# EAGLE board Blocky_Uno (EAGLE 9.1.0)
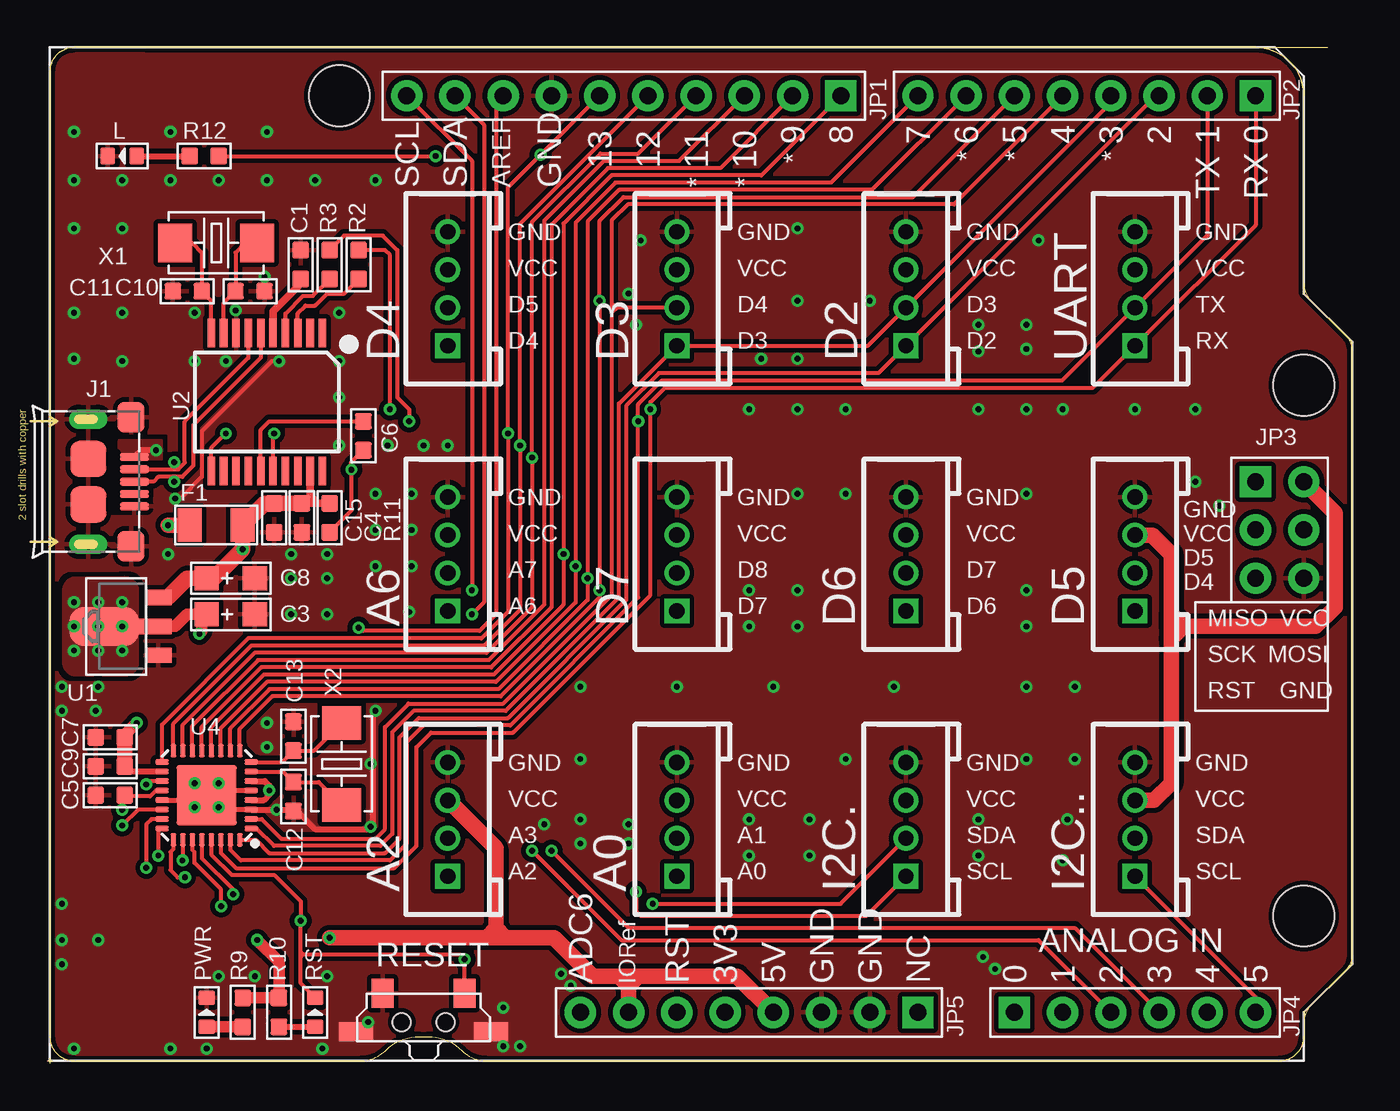
[diagram p0: board, top side]
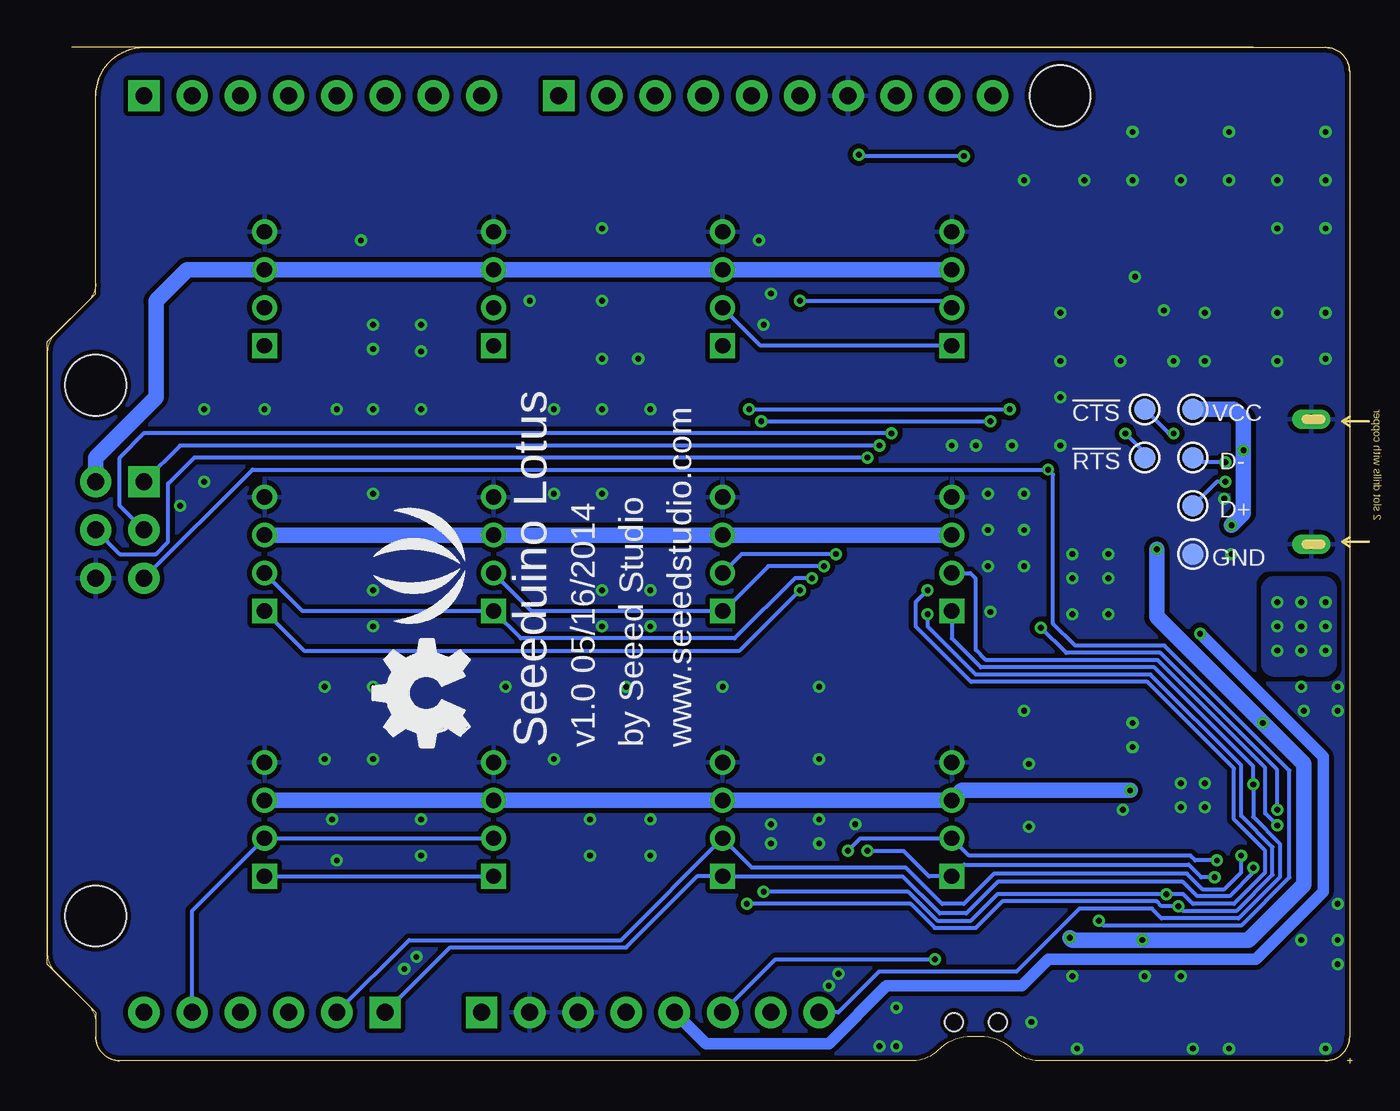
[diagram p1: board, bottom side, seen from below]

Size 68.71 x 53.47 mm. Coordinates in mm from the lower left corner, seen from the top.
Outline: 1.4,0.13 arc-90 0.13,1.4
Outline: 0.13,52.2 arc-90 1.4,53.47
Outline: 63.63,53.47 arc-90 66.17,50.93
Outline: 66.17,41.04 arc45 66.54,40.14 68.33,38.35 arc-45 68.71,37.45 68.71,5.73 arc-45 68.33,4.83 66.54,3.04 arc45 66.17,2.14
Outline: 66.17,2.14 66.17,1.4
Outline: 66.17,1.4 arc-90 64.9,0.13
Outline: 0.13,1.4 arc90 1.4,0.13
Outline: 64.9,0.13 arc90 66.17,1.4
Outline: 1.4,53.47 arc90 0.13,52.2
Outline: 0.13,1.4 arc90 1.4,0.13
Outline: 64.9,0.13 arc90 66.17,1.4
Outline: 66.17,50.93 arc90 63.63,53.47
Outline: 66.17,1.4 arc-90 64.9,0.13
Outline: 1.4,53.47 arc90 0.13,52.2
Outline: 0.13,1.4 arc90 1.4,0.13
Outline: 66.17,41.04 66.17,40.51 68.71,37.97 68.71,5.21 66.17,2.67 66.17,2.14
Outline: 66.17,50.93 arc90 63.63,53.47
Outline: 21.83,0.65 arc45 23.1,0.13
Outline: 16.53,0.13 arc45 17.8,0.65
Outline: 17.8,0.65 arc-45 19.59,1.4
Outline: 20.03,1.4 arc-45 21.83,0.65
Outline: 5.21,53.47 67.44,53.47
Outline: 0.13,1.4 arc90 1.4,0.13
Outline: 64.9,0.13 arc90 66.17,1.4
Outline: 1.4,53.47 arc90 0.13,52.2
Outline: 0.13,1.4 arc90 1.4,0.13
Outline: 64.9,0.13 arc90 66.17,1.4
Outline: 66.17,50.93 arc90 63.63,53.47
Outline: 66.17,1.4 arc-90 64.9,0.13
Outline: 63.63,53.47 1.4,53.47
Outline: 1.4,53.47 arc90 0.13,52.2
Outline: 0.13,52.2 0.13,1.4
Outline: 0.13,1.4 arc90 1.4,0.13
Outline: 66.17,41.04 66.17,50.93
Outline: 66.17,50.93 arc90 63.63,53.47
Outline: 21.83,0.65 arc45 23.1,0.13
Outline: 23.1,0.13 64.9,0.13
Outline: 1.4,0.13 16.53,0.13
Outline: 16.53,0.13 arc45 17.8,0.65
Outline: 17.8,0.65 arc-45 19.59,1.4
Outline: 19.59,1.4 20.03,1.4
Outline: 20.03,1.4 arc-45 21.83,0.65
Outline: 0,0.13 0.25,0.13
Outline: 0.13,0.25 0.13,0
Copper layers (1*16): Top 0.035mm / dielectric 1.5mm / Bottom 0.035mm
Design rules "SeeedStudio_rule_no_angle_090911 *": minimum track width 6mil, minimum drill 12mil, track to track 6mil, track to pad 6mil, pad to pad 6mil, via to via 6mil, smd to smd 0mil, copper to edge 10mil, drill to drill 10mil, minimum pad ring 10mil, minimum via ring 6mil, stop-mask expansion 2mil, vias tented up to drill 100mil, thermal gap 10mil
Net classes: 0 default: width 0.152 mm, drill 0.305 mm, clearance 0.152 mm; 3 usbvcc: width 0.203 mm, drill 0.305 mm, clearance 0.203 mm

## Footprints (pad centres in the part's own frame; a part is rotated, then mirrored left to right if it is on the bottom)
TP_4545 = smd 1.143 x 1.143: T 0,0
4P-2.0 = drill 0.8 pad 1.27 square: 1 -3,0 | drill 0.8 pad 1.27: 2 -1,0; 3 1,0; 4 3,0
C0603 = smd 0.889 x 0.889: 1 -0.762,0; 2 0.762,0
AVX-A = smd 1.27 x 1.27: + -1.27,0; - 1.27,0
F1206 = smd 1.27 x 1.778: 1 -1.397,0; 2 1.397,0
MICRO-USB5+6P-SMD-0.65-B = smd 0.4 x 1.5: 1 -1.3,-0.25; 2 -0.65,-0.25; 3 0,-0.25; 4 0.65,-0.25; 5 1.3,-0.25 | smd 1.6 x 1.4: S1 -3.4,-0.427; S6 3.4,-0.427 | drill 0.508 pad 1.016 long: S2 -3.3,-2.675; S5 3.3,-2.675 | smd 1.9 x 1.9: S3 -1.2,-2.675; S4 1.2,-2.675
LED-0603 = smd 0.762 x 0.889: + -0.762,0; - 0.762,0
R0603 = smd 0.889 x 0.889: 1 -0.762,0; 2 0.762,0
4P-SMD-7X3.5X3.5H = smd 1.143 x 1.524: 1 -2.159,1.524; 2 2.159,1.524 | smd 1.778 x 1.016: S1 -3.556,-0.508; S2 3.556,-0.508 | hole 0.95: -1.15,0; 1.15,0
SOT89 = smd 0.8 x 1.4: 1 -1.524,-1.905; 3 1.524,-1.905 | smd 0.8 x 1.9: 2 0,-1.651 | smd 2.032 x 3.65: 4 0,0.94
SSOP20 = smd 0.4 x 1.5: 1 -2.925,-3.625; 2 -2.275,-3.625; 3 -1.625,-3.625; 4 -0.975,-3.625; 5 -0.325,-3.625; 6 0.325,-3.625; 7 0.975,-3.625; 8 1.625,-3.625; 9 2.275,-3.625; 10 2.925,-3.625; 11 2.925,3.625; 12 2.275,3.625; 13 1.625,3.625; 14 0.975,3.625; 15 0.325,3.625; 16 -0.325,3.625; 17 -0.975,3.625; 18 -1.625,3.625; 19 -2.275,3.625; 20 -2.925,3.625
ARDUINO-38P = drill 0.889 pad 1.651 square: 1 63.5,50.8; 9 41.656,50.8; 19 50.8,2.54; 25 45.72,2.54; 38 63.5,30.48 | drill 0.889 pad 1.651: 2 60.96,50.8; 3 58.42,50.8; 4 55.88,50.8; 5 53.34,50.8; 6 50.8,50.8; 7 48.26,50.8; 8 45.72,50.8; 10 39.116,50.8; 11 36.576,50.8; 12 34.036,50.8; 13 31.496,50.8; 14 28.956,50.8; 15 26.416,50.8; 16 23.876,50.8; 17 21.336,50.8; 18 18.796,50.8; 20 53.34,2.54; 21 55.88,2.54; 22 58.42,2.54; 23 60.96,2.54; 24 63.5,2.54; 26 43.18,2.54; 27 40.64,2.54; 28 38.1,2.54; 29 35.56,2.54; 30 33.02,2.54; 31 30.48,2.54; 32 27.94,2.54; 33 66.04,30.48; 34 66.04,27.94; 35 66.04,25.4; 36 63.5,25.4; 37 63.5,27.94 | hole 3.2: 15.24,50.8; 66.04,35.56; 66.04,7.62
MLF32X-W/HEAT = smd 0.7 x 0.3: 1 -2.35,1.75; 2 -2.35,1.25; 3 -2.35,0.75; 4 -2.35,0.25; 5 -2.35,-0.25; 6 -2.35,-0.75; 7 -2.35,-1.25; 8 -2.35,-1.75; 17 2.35,-1.75; 18 2.35,-1.25; 19 2.35,-0.75; 20 2.35,-0.25; 21 2.35,0.25; 22 2.35,0.75; 23 2.35,1.25; 24 2.35,1.75 | smd 0.3 x 0.7: 9 -1.75,-2.35; 10 -1.25,-2.35; 11 -0.75,-2.35; 12 -0.25,-2.35; 13 0.25,-2.35; 14 0.75,-2.35; 15 1.25,-2.35; 16 1.75,-2.35; 25 1.75,2.35; 26 1.25,2.35; 27 0.75,2.35; 28 0.25,2.35; 29 -0.25,2.35; 30 -0.75,2.35; 31 -1.25,2.35; 32 -1.75,2.35 | smd 3.175 x 3.175: HEAT 0,0
2P-SMD-5X3.2 = smd 1.778 x 2.032: 1 -2.159,0; 2 2.159,0

## Placement (x,y rotation side)
!CTS  [TP_4545]  10.92,34.42 0 bottom
!RTS  [TP_4545]  10.92,31.88 0 bottom
A0  DIP Grove  [4P-2.0]  33.15,12.83 90 top
A2  DIP Grove  [4P-2.0]  21.08,12.83 90 top
A6  DIP Grove  [4P-2.0]  21.08,26.8 90 top
C1  10nF  [C0603]  13.34,42.04 90 top
C3  22uF-10V  [AVX-A]  9.65,23.62 0 top
C4  100nF  [C0603]  13.4,28.7 90 top
C5  100nF  [C0603]  3.3,14.1 0 top
C6  100nF  [C0603]  16.64,33.02 270 top
C7  100nF  [C0603]  3.3,17.14 0 top
C8  22uF-10V  [AVX-A]  9.65,25.53 0 top
C9  100nF  [C0603]  3.3,15.62 0 top
C10  12pF  [C0603]  10.67,40.64 180 top
C11  12pF  [C0603]  7.37,40.64 0 top
C12  12pF  [C0603]  12.95,14.03 90 top
C13  12pF  [C0603]  12.95,17.21 270 top
C15  100nF  [C0603]  11.94,28.7 270 top
D2  DIP Grove  [4P-2.0]  45.21,40.77 90 top
D3  DIP Grove  [4P-2.0]  33.15,40.77 90 top
D4  DIP Grove  [4P-2.0]  21.08,40.77 90 top
D5  DIP Grove  [4P-2.0]  57.28,26.8 90 top
D6  DIP Grove  [4P-2.0]  45.21,26.8 90 top
D7  DIP Grove  [4P-2.0]  33.15,26.8 90 top
D+  [TP_4545]  8.38,29.34 0 bottom
D-  [TP_4545]  8.38,31.88 0 bottom
F1  500mA  [F1206]  8.89,28.32 0 top
GND  [TP_4545]  8.38,26.8 0 bottom
I2C.  DIP Grove  [4P-2.0]  45.21,12.83 90 top
I2C..  DIP Grove  [4P-2.0]  57.28,12.83 90 top
J1  10118193-0001LF  [MICRO-USB5+6P-SMD-0.65-B]  4.83,30.61 270 top
L  GREEN  [LED-0603]  3.94,47.75 180 top
PWR  GREEN  [LED-0603]  8.38,2.67 90 top
R2  1k  [R0603]  16.38,42.04 270 top
R3  1k  [R0603]  14.86,42.04 270 top
R9  1k  [R0603]  10.29,2.67 270 top
R10  1k  [R0603]  12.19,2.67 270 top
R11  10k  [R0603]  14.86,28.7 270 top
R12  1k  [R0603]  8.26,47.75 180 top
RESET  TS-118E  [4P-SMD-7X3.5X3.5H]  19.81,2.16 0 top
RST  RED  [LED-0603]  14.1,2.67 90 top
U1  1117-3.3V  [SOT89]  3.94,22.99 90 top
U2  CH340T  [SSOP20]  11.56,34.8 180 top
U3  [ARDUINO-38P]  0.13,0.13 0 top
U4  ATmega328mu  [MLF32X-W/HEAT]  8.38,14.1 180 top
U$2  [OSHW_FILLX200_NOTEXT]  46.48,16.64 90 bottom
U$4  [LOGO_SILK]  48.39,26.16 90 bottom
U$12  [SEEED_MASK]  3.94,2.67 0 top
UART  DIP Grove  [4P-2.0]  57.28,40.77 90 top
VCC  [TP_4545]  8.38,34.42 0 bottom
X1  12MHz  [2P-SMD-5X3.2]  8.89,43.18 0 top
X2  16MHz  [2P-SMD-5X3.2]  15.49,15.75 270 top

## Library data of the parts
!CTS !RTS D+ D- GND VCC = Discrete; PARTNO: DNP
A0 A2 A6 = Connector 
C1 C3-C13 C15 F1 L PWR R2 R3 R9-R12 RESET RST X1 X2 = Discrete
D2-D7 I2C. I2C.. UART = Connector
J1 = Seeed-Connector -2016; MPN: 10118193-0001LF
U1 U4 = IC
U2 = template
U3 = moudle
U$2 U$4 U$12 = Logo

## Nets
3V3: C3.+ U1.2 U1.4 U3.29
ADC6: A6.1 U3.32 U4.19
ADC7: A6.2 U4.22
AREF: C5.2 U3.16 U4.20
CTS: !CTS.T U2.11
DTR: C6.1 U2.15
GND: A0.4 A2.4 A6.4 C1.2 C3.- C4.1 C5.1 C7.1 C8.- C9.1 C10.1 C11.1 C12.1 C13.1 C15.2 D2.4 D3.4 D4.4 D5.4 D6.4 D7.4 GND.T I2C..4 I2C...4 J1.5 J1.S1 J1.S2 J1.S3 J1.S4 J1.S5 J1.S6 L.- PWR.- RESET.1 RESET.S1 RESET.S2 U1.1 U2.8 U3.15 U3.26 U3.27 U3.35 U4.3 U4.5 U4.21 U4.HEAT UART.4
N$2: R10.2 RST.+
N$3: PWR.+ R9.2
N$4: C10.2 U2.9 X1.2
N$5: C11.2 U2.10 X1.1
N$11: !RTS.T U2.16
N$12 [usbvcc]: F1.1 J1.1 VCC.T
N$13: L.+ R12.2
PB0: D7.2 U3.9 U4.12
PB1: U3.10 U4.13
PB2: U3.11 U4.14
PB3/MOSI: U3.12 U3.34 U4.15
PB4/MISO: U3.13 U3.38 U4.16
PB5/SCK: R12.1 U3.14 U3.37 U4.17
PC0: A0.1 U3.19 U4.23
PC1: A0.2 U3.20 U4.24
PC2: A2.1 U3.21 U4.25
PC3: A2.2 U3.22 U4.26
PC4/SDA: I2C..2 I2C...2 U3.17 U3.23 U4.27
PC5/SCL: I2C..1 I2C...1 U3.18 U3.24 U4.28
PD0/RX: R2.1 U3.1 U4.30 UART.1
PD1/TX: R3.1 U3.2 U4.31 UART.2
PD2/INT0: D2.1 U3.3 U4.32
PD3/INT1: D2.2 D3.1 U3.4 U4.1
PD4: D3.2 D4.1 U3.5 U4.2
PD5: D4.2 D5.1 U3.6 U4.9
PD6: D5.2 D6.1 U3.7 U4.10
PD7: D6.2 D7.1 U3.8 U4.11
PWR_IN: U3.25
RESET: C6.2 R11.2 RESET.2 RST.- U3.30 U3.36 U4.29
RX: R3.2 U2.4
TX: R2.2 U2.3
USB_D+: D+.T J1.3 U2.6
USB_D-: D-.T J1.2 U2.7
V3: C1.1 U2.5
VCC: A0.3 A2.3 A6.3 C4.2 C7.2 C8.+ C9.2 C15.1 D2.3 D3.3 D4.3 D5.3 D6.3 D7.3 F1.2 I2C..3 I2C...3 R9.1 R10.1 R11.1 U1.3 U2.19 U3.28 U3.31 U3.33 U4.4 U4.6 U4.18 UART.3
XTAL1: C12.2 U4.7 X2.2
XTAL2: C13.2 U4.8 X2.1

## Tracks (layer width: path | path; a pad name or v marks a point on that pad's centre or on a via)
3V3  (via drill 0.3 pad 0.64)
  Top 0.61: v8,22.61 8.13,22.73 8.13,23.49 8.26,23.62 | v3.94,22.99 U1.4 | 8.38,23.49 8.51,23.62 | U1.2 6.73,22.99 7.37,23.62 C3.+
  Top 0.813: 8.26,23.62 C3.+ 8.38,23.49
  Bottom 0.61: U3.29 34.04,1.02 27.56,1.02 24.51,4.06 17.4,4.06 16,5.46 5.08,5.46 1.52,9.02 1.52,16.13 v8,22.61
  other vias: 3.94,24.26 2.67,24.26 1.4,24.26 2.67,22.99 1.4,22.99 1.4,21.72 2.67,21.72 3.94,21.72
  pour Top (isolate 0.254, no thermals): 4.06,20.45 1.52,20.45 arc-90 0.89,21.08 0.89,24.89 arc-90 1.52,25.53 4.06,25.53 arc-90 4.7,24.89 4.7,21.08 arc-90
  pour Bottom (isolate 0.254, no thermals): 4.06,20.45 1.52,20.45 arc-90 0.89,21.08 0.89,24.89 arc-90 1.52,25.53 4.06,25.53 arc-90 4.7,24.89 4.7,21.08 arc-90
ADC6  (via drill 0.3 pad 0.64)
  Top 0.203: U4.19 5.38,14.85 v5.21,14.67
  Bottom 0.203: U3.32 27.05,2.67 24.89,4.83 17.65,4.83 14.35,8.13 10.54,8.13 10.03,7.62 5.97,7.62 3.81,9.78 3.81,11.56 5.21,12.95 v5.21,14.67 5.21,15.63 10.41,20.83 19.56,20.83 21.08,22.35 A6.1
ADC7  (via drill 0.3 pad 0.64)
  Top 0.203: U4.22 4.77,13.35 v3.94,12.51
  Bottom 0.203: A6.2 20.1,25.8 19.81,25.51 19.81,21.75 19.27,21.21 10.24,21.21 4.57,15.54 4.57,13.15 v3.94,12.51
AREF  (via drill 0.3 pad 0.64)
  Top 0.203: U3.16 23.62,50.55 23.62,23.62 22.75,22.75 16.62,22.75 16.45,22.92 v16.38,22.92 | U4.20 5.71,14.35 5.4,14.03 4.13,14.03 C5.2 3.94,13.97 v3.94,13.34
  Bottom 0.203: v3.94,13.34 3.94,15.43 10.1,21.59 15.05,21.59 v16.38,22.92
CTS  (via drill 0.3 pad 0.61)
  Top 0.203: U2.11 8.63,32.38 v9.4,33.15
  Bottom 0.203: v9.4,33.15 9.65,33.15 !CTS.T
DTR
  Top 0.203: U2.15 11.23,33.33 11.68,33.78 C6.1
GND  (via drill 0.3 pad 0.64)
  Top 0.203: v12.19,36.96 11.81,36.96 8.13,33.27 8.13,30.86 6.98,29.72 v6.73,29.72
  Top 0.254: U4.21 6.86,13.85 v7.75,14.73 U4.HEAT | U4.3 9.13,13.35 v9.02,13.46 | U4.5 9.4,14.35 v9.02,14.73
  Top 0.305: U4.3 12.88,13.35 C12.1 13.15,13.27 14.1,12.32 16.89,12.32 17.14,12.57 17.14,18.54
  other vias: 14.48,0.76 16.89,2.16 24.89,0.89 36.96,24.89 39.5,24.89 39.5,22.99 36.96,22.99 51.56,24.89 51.56,22.99 49.02,12.83 40.13,10.92 53.72,12.83 49.02,10.92 40.13,12.83 53.47,10.67 26.16,12.57 30.61,12.57 27.05,4.7 27.56,4.06 24,0.89 1.4,43.94 3.94,43.94 1.4,49.02 17.27,28.07 60.45,30.61 61.72,29.34 37.59,37.08 39.5,37.08 30.99,38.86 30.61,40.51 31.24,43.31 49.28,5.59 49.91,4.95 1.4,39.5 3.94,39.5 19.81,32.51 21.08,32.51 30.61,11.56 36.96,10.92 36.96,12.83 49.02,37.47 49.02,38.86 7.75,13.46 11.56,17.91 0.76,19.81 2.67,19.81 0.76,18.54 0.76,6.48 0.76,8.38 2.67,6.48 1.4,0.76 6.48,0.76 8.38,0.76 14.73,4.57 12.83,25.53 12.83,23.62 14.73,23.62 2.54,18.54 17.27,18.54 17.02,15.75 12.07,13.34 17.02,12.45 3.94,46.48 1.4,46.48 6.48,46.48 9.02,46.48 11.56,46.48 14.1,46.48 17.27,46.48 6.48,49.02 11.56,49.02 1.4,37.08 9.91,39.62 11.43,41.4 15.37,32.51 15.37,35.05 17.91,32.51 9.4,36.96 15.37,36.96 28.07,11.56 28.07,12.83 28.07,16 28.07,19.81 33.15,19.81 38.23,19.81 44.58,19.81 51.56,19.81 54.1,19.81 54.1,16 51.56,16 42.04,16 36.96,34.42 39.5,34.42 42.04,34.42 43.31,40.13 39.5,40.13 39.5,43.94 52.2,43.31 51.56,38.86 51.56,37.59 49.02,34.42 51.56,34.42 53.47,34.42 60.45,34.42 57.28,34.42 17.27,29.97 19.18,29.97 19.18,28.07 17.27,26.16 19.05,23.75 19.18,26.16 51.56,29.97 39.5,29.97 42.04,29.97 7.75,39.5 7.75,36.96 15.37,39.5 9.02,4.57 10.92,4.57 0.76,5.21 14.73,25.53 14.73,26.8 12.83,26.8 6.35,26.8 11.56,16.64 3.94,36.96 24,2.92
  pour Bottom (isolate 0.254, rank 6): 0.13,0.13 68.71,0.13 68.71,53.47 0.13,53.47
  pour Top (isolate 0.254, rank 6): 0.13,0.13 68.71,0.13 68.71,53.47 0.13,53.47
N$2
  Top 0.305: R10.2 RST.+
N$3
  Top 0.61: PWR.+ R9.2
N$4
  Top 0.203: U2.9 9.28,40.02 C10.2 9.91,42.67 10.41,43.18 X1.2
N$5
  Top 0.203: U2.10 8.63,40.14 C11.2 8.13,42.67 7.62,43.18 X1.1
N$11  (via drill 0.3 pad 0.61)
  Top 0.203: U2.16 11.88,33.09 v11.94,33.15
  Bottom 0.203: !RTS.T 10.92,32.13 v11.94,33.15
N$12  (via drill 0.3 pad 0.64)
  Top 0.305: v5.71,32.26 4.93,32.26 J1.1
  Top 0.813: v6.35,28.32 F1.1
  Bottom 0.813: VCC.T 6.22,34.42 5.71,33.91 v5.71,32.26 5.71,28.96 v6.35,28.32
  pour Top (isolate 0.254, no thermals): 3.81,32.77 5.97,32.77 5.97,31.81 3.81,31.81
N$13
  Top 0.305: L.+ R12.2
PB0  (via drill 0.3 pad 0.64)
  Top 0.203: U3.9 37.59,46.74 29.72,46.74 27.18,44.2 v27.18,26.8 27.18,24.13 23.49,20.45 11.39,20.45 8.63,17.69 U4.12
  Bottom 0.203: v27.18,26.8 32.15,26.8 D7.2
PB1
  Top 0.203: U3.10 35.43,47.12 29.52,47.12 26.54,44.14 26.54,24 23.37,20.83 11.26,20.83 8.13,17.7 U4.13
PB2
  Top 0.203: U3.11 33.27,47.5 29.32,47.5 26.16,44.34 26.16,24.13 23.24,21.21 11.09,21.21 7.63,17.75 U4.14
PB3/MOSI  (via drill 0.3 pad 0.64)
  Top 0.203: U4.15 7.13,17.82 10.9,21.59 23.11,21.59 25.53,24 v25.53,31.88 25.53,44.28 29.12,47.88 31.11,47.88 U3.12
  Bottom 0.203: U3.34 64.9,26.8 62.99,26.8 62.36,27.43 62.36,30.5 60.98,31.88 v25.53,31.88
PB4/MISO  (via drill 0.3 pad 0.64)
  Top 0.203: U4.16 6.63,17.87 10.73,21.97 22.99,21.97 24.89,23.88 v24.89,32.51 24.89,44.2 U3.13
  Bottom 0.203: v24.89,32.51 61.72,32.51 U3.38
PB5/SCK  (via drill 0.3 pad 0.64)
  Top 0.203: U4.17 6.03,17.82 10.56,22.35 22.86,22.35 24.26,23.75 v24.26,33.15 24.26,46.1 v25.97,47.82 U3.14 | R12.1 v20.45,47.75
  Bottom 0.203: U3.37 64.9,29.34 64.9,31.88 63.63,33.15 v24.26,33.15 | v20.45,47.75 25.91,47.75 v25.97,47.82
PC0  (via drill 0.3 pad 0.64)
  Top 0.203: U4.23 5.48,12.85 5.21,12.57 v5.21,10.29
  Bottom 0.203: U3.19 47.5,6.1 38.23,6.1 34.5,9.83 A0.1 23.67,9.83 21.72,7.87 20.32,7.87 18.66,9.54 8.9,9.54 8.16,8.79 6.45,8.79 5.21,10.03 v5.21,10.29
PC1  (via drill 0.3 pad 0.64)
  Top 0.203: U4.24 5.87,12.35 5.84,12.32 v5.84,10.92
  Bottom 0.203: U3.20 49.66,6.48 38.5,6.48 A0.2 31.61,10.29 23.49,10.29 21.59,8.38 20.45,8.38 18.86,9.97 8.7,9.97 7.89,9.16 6.72,9.16 5.84,10.03 v5.84,10.92
PC2  (via drill 0.3 pad 0.64)
  Top 0.203: U4.25 6.63,11.27 6.48,11.11 6.48,10.16 6.86,9.78 v7.24,9.78 | v25.53,11.18 30.23,6.48 52.2,6.48 U3.21
  Bottom 0.203: v25.53,11.18 23.62,11.18 22.27,9.83 A2.1 21.03,9.83 20.42,10.44 8.6,10.44 7.94,9.78 v7.24,9.78
PC3  (via drill 0.3 pad 0.64)
  Top 0.203: U3.22 54.1,7.11 30.61,7.11 v26.54,11.18 | U4.26 7.13,10.69 v7.11,10.67
  Bottom 0.203: v26.54,11.18 25.91,11.81 21.1,11.81 A2.2 20.18,10.92 8.51,10.92 8.26,10.67 v7.11,10.67
PC4/SDA  (via drill 0.3 pad 0.64)
  Top 0.203: v31.88,8.38 41.77,8.38 I2C..2 | U3.17 22.99,49.4 22.99,24.26 v22.35,23.62 | U4.27 7.63,11.23 7.75,11.11 7.75,10.54 9.14,9.14 v9.14,8.26
  Bottom 0.203: I2C..2 I2C...2 61.09,8.02 U3.23 | v31.88,8.38 23.24,8.38 21.97,7.11 19.81,7.11 18.41,8.51 10.29,8.51 10.03,8.26 v9.14,8.26 8.89,8 6.1,8 4.19,9.91 4.19,11.37 5.84,13.02 5.84,15.67 10.62,20.45 19.81,20.45 22.35,22.99 v22.35,23.62
PC5/SCL  (via drill 0.3 pad 0.64)
  Top 0.203: U3.24 63.63,3.48 I2C...1 | I2C..1 43.13,7.75 31.24,7.75 30.99,8 v30.99,9.02 | U3.18 22.35,47.5 v22.35,24.89 | U4.28 8.13,10.79 9.78,9.14 v9.78,8.89
  Bottom 0.203: I2C...1 I2C..1 | v30.99,9.02 23.37,9.02 21.84,7.49 20.07,7.49 18.67,8.89 v9.78,8.89 8.89,8.89 8.38,8.38 6.22,8.38 4.57,10.03 4.57,11.18 6.22,12.83 6.22,15.52 10.77,20.07 20.07,20.07 22.99,22.99 22.99,24.26 v22.35,24.89
PD0/RX  (via drill 0.3 pad 0.64)
  Top 0.203: U3.1 63.63,44.12 UART.1 55.07,35.56 32.51,35.56 31.75,34.8 v31.75,34.42 31.75,24.64 24.51,17.4 20.19,17.4 19.43,16.64 19.43,11.43 18.26,10.26 9.94,10.26 9.13,11.07 U4.30 | v18.03,34.42 18.03,42.55 17.78,42.8 R2.1
  Bottom 0.203: v31.75,34.42 v18.03,34.42
PD1/TX  (via drill 0.3 pad 0.64)
  Top 0.203: U3.2 61.09,43.58 UART.2 53.45,35.94 32.37,35.94 31.11,34.68 v31.11,33.78 31.11,24.51 24.38,17.78 19.81,17.78 18.92,16.89 18.92,11.56 18.03,10.67 10.19,10.67 9.63,11.22 U4.31 | v19.05,33.78 19.05,34.42 18.41,35.05 18.41,42.8 17.65,43.56 15.62,43.56 R3.1
  Bottom 0.203: v31.11,33.78 v19.05,33.78
PD2/INT0
  Top 0.203: U3.3 58.37,50.93 D2.1 43.77,36.32 32.21,36.32 30.48,34.6 30.48,24.38 24.26,18.16 19.56,18.16 18.54,17.14 18.54,11.81 17.78,11.05 11.68,11.05 10.99,11.75 U4.32 10.13,11.59
PD3/INT1
  Top 0.203: U3.4 56.01,50.56 D2.2 43.21,37.77 D3.1 30.1,34.72 30.1,24.51 24.13,18.54 19.28,18.54 18.16,17.42 18.16,12.07 17.53,11.43 11.94,11.43 11.02,12.35 U4.1
PD4
  Top 0.203: U3.5 47.75,45.21 30.57,45.21 29.72,44.36 29.72,40.01 | 29.72,40.01 29.72,39.75 | D3.2 29.99,39.77 | 29.96,39.77 29.73,39.77 29.72,39.75 | 29.72,39.5 29.72,24.64 24,18.92 19.01,18.92 17.78,17.69 17.78,12.32 17.27,11.81 12.32,11.81 11.28,12.85 U4.2 | 29.99,39.77 29.96,39.77 | 29.96,39.77 29.72,40.01 | 29.99,39.77 29.72,39.5 | 29.72,39.5 29.72,39.75
  Bottom 0.203: D4.1 31.15,37.77 D3.2
PD5  (via drill 0.3 pad 0.64)
  Top 0.203: U3.6 45.59,45.59 30.33,45.59 29.08,44.34 v29.08,40.13 v29.08,24.89 29.08,24.51 23.88,19.3 11.84,19.3 10.13,17.6 U4.9 10.1,16.48
  Bottom 0.203: D5.1 55.2,21.72 32.26,21.72 v29.08,24.89 | v29.08,40.13 21.45,40.13 D4.2
PD6  (via drill 0.3 pad 0.64)
  Top 0.203: U3.7 43.43,45.97 30.1,45.97 28.45,44.32 v28.45,25.53 28.45,24.38 23.75,19.68 11.7,19.68 9.63,17.62 U4.10
  Bottom 0.203: D5.2 55.28,23.8 D6.1 43.77,22.35 32.51,22.35 29.34,25.53 v28.45,25.53
PD7  (via drill 0.3 pad 0.64)
  Top 0.203: U3.8 41.28,46.36 29.91,46.36 27.81,44.25 v27.81,26.16 27.81,24.26 23.62,20.07 11.57,20.07 9.13,17.63 U4.11
  Bottom 0.203: D6.2 43.21,23.8 D7.1 33.1,23.8 30.73,26.16 v27.81,26.16
RESET  (via drill 0.3 pad 0.61, 0.3 pad 0.64)
  Top 0.203: U4.29 8.63,10.98 9.7,9.91 11.94,9.91 13.34,8.51 v13.34,7.49 13.34,5.84 | RST.- 13.34,4.19 13.34,5.59 | 13.34,5.59 13.34,5.84 | 13.46,5.71 13.34,5.84 | 13.46,5.71 21.72,5.71 v21.97,5.46 RESET.2 | 13.46,5.71 13.34,5.59 | R11.2 16,29.08 v16,31.24 16,31.62 C6.2
  Bottom 0.203: U3.30 30.35,5.46 v21.97,5.46 | U3.36 57.91,31.24 v16,31.24 15.75,30.99 15.75,23.14 14.58,21.97 9.88,21.97 3.3,15.4 3.3,9.76 3.32,9.76 5.84,7.24 13.08,7.24 v13.34,7.49
RX
  Top 0.203: U2.4 12.53,39.46 13.46,40.39 13.97,40.39 R3.2
TX
  Top 0.203: U2.3 13.18,39.47 13.59,39.88 14.1,39.88 14.73,40.51 15.62,40.51 R2.2
USB_D+  (via drill 0.3 pad 0.64)
  Top 0.203: U2.6 11.23,37.14 7.68,33.59 7.68,31.45 7.1,30.86 6.73,30.86 | 6.73,30.86 5.84,30.86 5.59,30.61 J1.3 | v6.67,30.61 6.67,30.8 6.73,30.86
  Bottom 0.203: 8.38,29.46 D+.T 7.11,30.61 v6.67,30.61
USB_D-  (via drill 0.3 pad 0.64)
  Top 0.203: J1.2 6.6,31.26 | 6.6,31.26 6.89,31.26 7.24,31.61 7.24,33.78 10.58,37.12 U2.7 | v6.67,31.62 6.67,31.32 6.6,31.26
  Bottom 0.203: v6.67,31.62 8.13,31.62 D-.T
V3
  Top 0.406: U2.5 11.88,39.57 13.21,40.89 13.21,41.15 C1.1
VCC  (via drill 0.3 pad 0.64)
  Top 0.305: U4.18 4.34,15.35 C9.2 | U4.6 11.44,14.85 11.68,14.61 v11.68,14.35 11.68,14.13 11.4,13.85 U4.4
  Top 0.406: 21,27.88 A6.3 | U2.19 13.83,29.86 | 13.83,29.86 13.83,29.83 13.46,29.46 | 13.46,29.46 C4.2 | 13.46,29.46 14.22,29.46 | 14.22,29.46 R11.1 | 13.83,29.86 14.22,29.46
  Top 0.61: 21.07,27.81 A6.3 | R9.1 R10.1 12.19,5.33 v11.05,6.48 | C7.2 4.06,17.27 v4.7,17.91
  Top 0.813: D5.3 58.18,27.8 59.18,26.8 59.18,23.62 | 59.18,22.99 59.18,22.35 | 59.18,22.35 59.18,14.73 58.28,13.83 I2C...3 | U3.33 67.82,28.96 67.82,24 66.8,22.99 59.82,22.99 | 59.82,22.99 59.18,22.99 | 59.82,22.99 59.18,23.62 | 59.82,22.99 59.18,22.35 | 59.18,22.99 59.18,23.62 | U3.28 36.32,4.57 31.11,4.57 | 31.11,4.57 30.1,4.57 | 30.1,4.57 28.7,4.57 26.67,6.6 24.13,6.6 | U3.31 30.61,4.06 | 30.61,4.06 31.11,4.57 | 30.61,4.06 30.1,4.57 | 24.13,6.6 23.11,6.6 | A2.3 21.1,13.83 23.62,11.3 23.62,7.11 | 23.62,7.11 23.11,6.6 | 23.62,7.11 24.13,6.6 | 23.11,6.6 v14.86,6.6 | C7.2 C9.2 | U1.3 6.35,24.51 7.37,25.53 C8.+ 8.76,25.53 v10.29,27.05 F1.2 | 10.29,28.45 F1.2 | F1.2 11.43,29.46 C15.1 C4.2
  Bottom 0.813: A6.3 D7.3 D6.3 D5.3 | D4.3 D3.3 D2.3 UART.3 61.36,41.77 62.99,40.13 62.99,35.05 66.17,31.88 U3.33 | I2C...3 I2C..3 A0.3 A2.3 20.56,14.35 v11.68,14.35 | v14.86,6.6 14.73,6.48 v11.05,6.48 5.46,6.48 2.54,9.4 2.54,15.75 v4.7,17.91 10.29,23.49 v10.29,27.05
XTAL1
  Top 0.203: U4.7 12.4,15.35 C12.2 14.29,14.79 X2.2
XTAL2
  Top 0.203: U4.8 12.35,15.85 C13.2 14.03,16.45 X2.1

## Text on the board
tPlace: 9 | 8 | 7 | 6 | 5 | 4 | 3 | 2 | 1 | 0 | 13 | 12 | 11 | 10 | * | * | * | * | SCL | SDA | AREF | GND | * | * | TX | RX | GND | GND | GND | GND | VCC | VCC | VCC | VCC | D5 | D4 | D3 | TX | D4 | D3 | D2 | RX | GND | GND | GND | GND | VCC | VCC | VCC | VCC | D5 | A7 | D8 | D7 | D4 | A6 | D7 | D6 | MISO | VCC | SCK | MOSI | RST | GND | GND | GND | GND | GND | VCC | VCC | VCC | VCC | A3 | A1 | SDA | SDA | A2 | A0 | SCL | SCL | ANALOG IN | ADC6 | IORef | RST | 3V3 | 5V | GND | GND | NC | 0 | 1 | 2 | 3 | 4 | 5
bPlace: www.seeedstudio.com | by Seeed Studio | v1.0 05/16/2014 | Seeeduino Lotus
bPlate: A0 | A2 | A4 | SPI | UART